# Altium PCB ALTAIR_PD_Sergeant_V26.3b.PcbDoc (part 4 of 4)
Units mm, origin at the board's own origin, x right, y up, seen from the top; angles counter-clockwise.
Board outline 74 x 56 mm, 4 copper layers (Top Layer, Layer 1, Layer 2, Bottom Layer), stack 1.675 mm thick; 215 components, 142 nets, 676 pads, 469 vias.
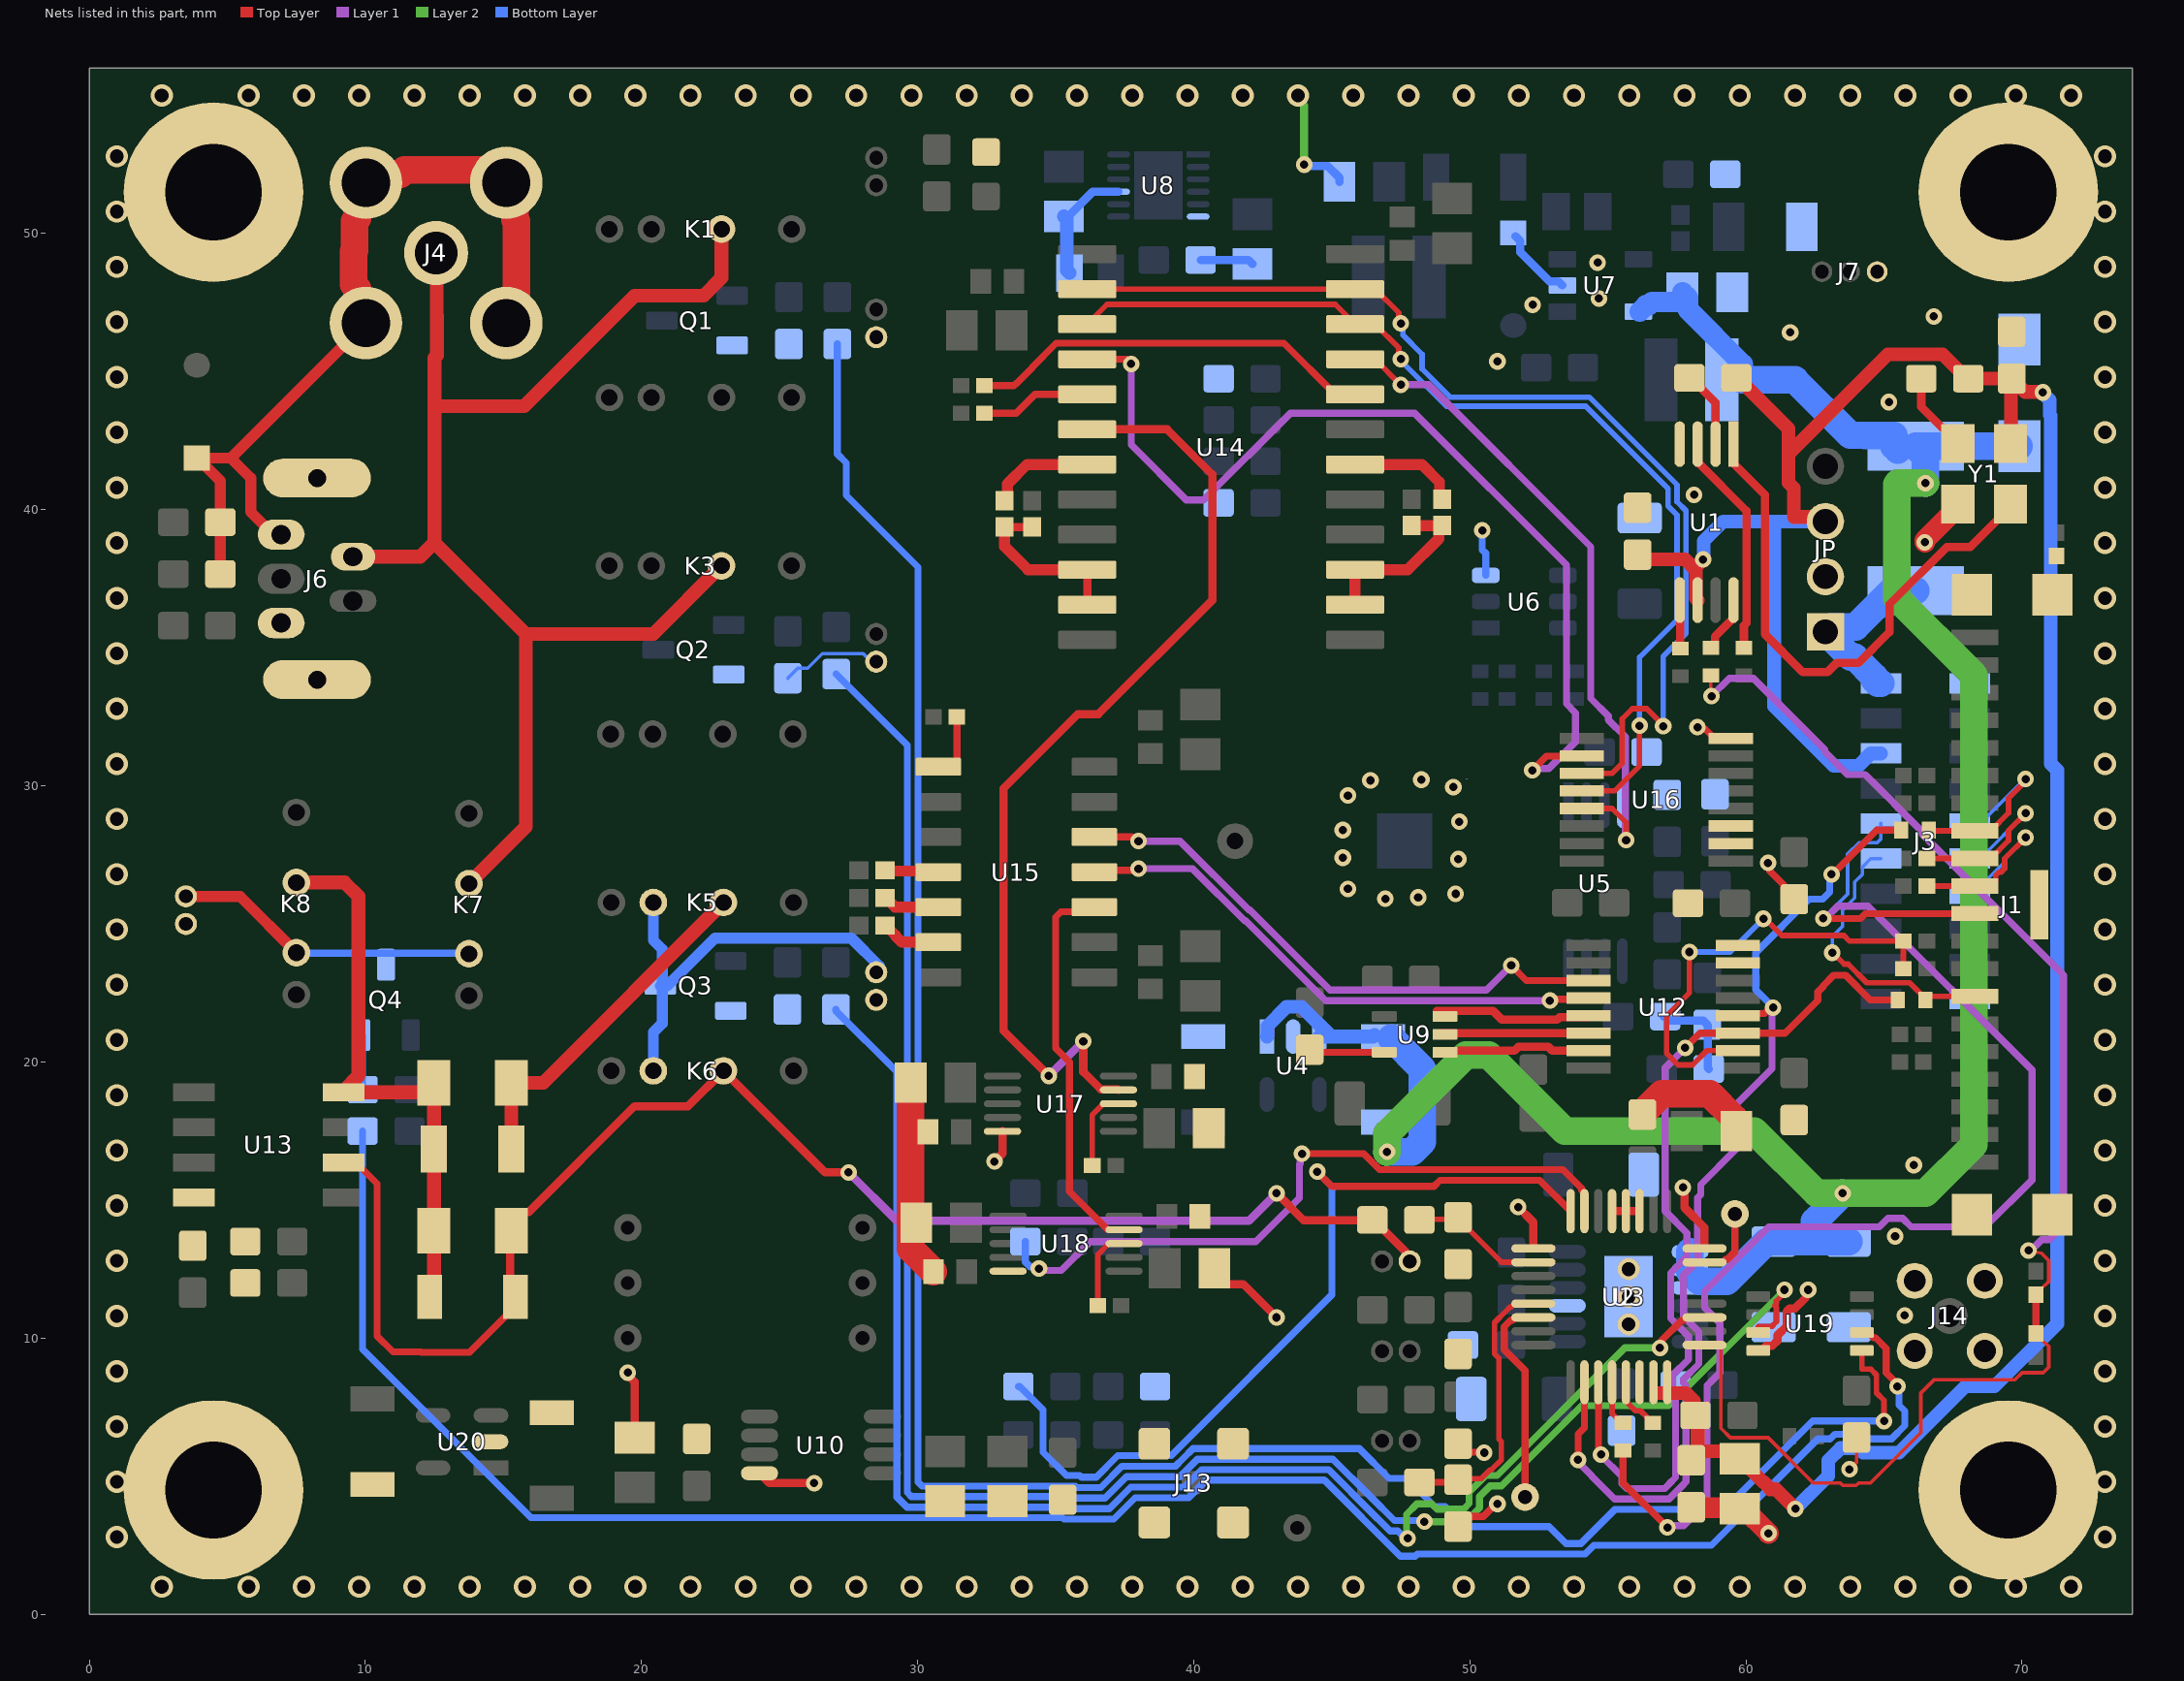
[diagram p5: the nets of this part, all layers, seen from the top]

## Via types
v1: diameter 0.6, hole 0.3, Top Layer to Bottom Layer, 303 vias
v2: diameter 0.8, hole 0.5, Top Layer to Bottom Layer, 122 vias
v3: diameter 0.6, hole 0.3, Top Layer to Bottom Layer, tented both sides, 44 vias

## Nets (pads, with @x,y where several pads share a name; then routed paths per layer and width w, separated by ;. In a path a pad name is that pad's centre, name@x,y a point inside that pad or via, vN(x,y) a via of type N, cw(c..) or ccw(c..) an arc to the next point about the centre after c; other vN are vias at no path point) (continued)
NetR36_2: R36.2 U19.5 | length 84.4
  Top Layer w0.2: U19.5@64.196,9.554 64.196,8.877 64.521,8.877 64.727,8.671 64.727,8.023 65,7.75 v1(65,7)
  Bottom Layer w0.254: R36.2@27.092,46.003 27.092,42.019 27.414,41.697 27.414,40.52 30.012,37.922 30.012,4.792 30.161,4.643 35.722,4.643 35.777,4.588 36.628,4.588 37.405,5.365 39.34,5.365 39.618,5.643 39.975,6 45.995,6 47.072,4.924 47.699,4.924 48.722,3.9 49.1,3.9 49.822,3.178 52.866,3.178 53.482,2.563 54.018,2.563 55.249,3.794 59.209,3.794 62.415,7 v1(65,7)
NetR38_2: R38.2 U19.6 | length 74.3
  Top Layer w0.254: U19.6@64.196,10.204 64.421,10.204 64.617,10.008 64.697,10.008 65.079,9.626 65.079,8.749 65.484,8.344 v1(65.484,8.25)
  Bottom Layer w0.254: R38.2@9.9,17.5 9.9,9.6 16,3.5 35.248,3.5 35.303,3.445 37.102,3.445 37.879,4.222 39.813,4.222 40.448,4.857 44.728,4.857 47.482,2.103 48.018,2.103 48.097,2.182 54.176,2.182 54.494,2.5 58.75,2.5 62.603,6.353 63.051,6.353 63.222,6.524 64.278,6.524 64.449,6.353 65.268,6.353 65.75,6.835 65.75,7.363 65.544,7.569 65.544,8.19 v1(65.484,8.25)
NetR39_2: R39.2 U19.3 | length 70.1
  Top Layer w0.2: U19.3@60.446,10.204 60.446,10.427 60.936,10.427 61.098,10.59 61.098,11.119 61.038,11.179 61.098,11.24 61.098,11.348 61.448,11.698 v1(61.396,11.75)
  Layer 2 w0.254: v1(48.354,3.354) 49.858,3.354 50.353,3.849 50.353,4.268 50.732,4.647 51.151,4.647 54.056,7.552 57.198,7.552 v1(61.396,11.75)
  Bottom Layer w0.254: R39.2@27.05,34.05 29.631,31.469 29.631,4.411 29.78,4.262 35.564,4.262 35.619,4.207 36.786,4.207 36.841,4.262 37.563,4.984 39.498,4.984 40.133,5.619 45.044,5.619 46.401,4.262 47.266,3.397 48.311,3.397 v1(48.354,3.354)
NetR42_2: R42.2 U2.19 | length 54
  Top Layer w0.254: v1(56.884,9.651) 56.951,9.717 56.951,9.922 57.683,10.654 57.742,10.654 57.838,10.75 U2.19@58.5,10.75
  Layer 2 w0.254: v1(47.75,2.75) 47.707,2.793 47.707,3.622 48.086,4.001 48.622,4.001 48.811,3.811 49.777,3.811 49.972,4.007 49.972,4.426 50.574,5.028 50.993,5.028 55.616,9.651 v1(56.884,9.651)
  Bottom Layer w0.254: R42.2@27.04,21.907 27.04,21.857 29.25,19.647 29.25,4.25 29.619,3.881 35.406,3.881 35.461,3.826 36.944,3.826 36.999,3.881 37.721,4.603 39.655,4.603 40.052,5 40.29,5.238 44.886,5.238 45.124,5 46.243,3.881 47.108,3.016 47.39,3.016 47.656,2.75 v1(47.75,2.75)
NetR48_1: R48.1 U2.31 | length 25
  Top Layer w0.254: v1(43.921,16.681) 46.152,16.681 46.732,16.101 53.37,16.101 54.054,15.417 54.054,15.358 54.15,15.262 U2.31@54.15,14.6
  Layer 1 w0.254: v1(34.395,12.52) 34.461,12.454 34.947,12.454 34.949,12.453 35.203,12.453 36.25,13.5 42.25,13.5 43.825,15.075 43.825,16.296 43.855,16.327 43.855,16.615 v1(43.921,16.681)
  Bottom Layer w0.254: R48.1@33.9,13.5 33.9,12.76 34.073,12.586 34.328,12.586 v1(34.395,12.52)
NetR50_1: R50.1 U2.32 | length 31
  Top Layer w0.254: v1(44.472,16.028) 45,15.5 48.702,15.5 48.922,15.72 52.53,15.72 U2.32@53.65,14.6
  Bottom Layer w0.254: R50.1@33.65,8.25 33.7,8.25 34.546,7.404 34.546,5.868 35.39,5.024 35.879,5.024 35.934,4.969 36.47,4.969 37.247,5.746 39.182,5.746 45,11.564 45,15.5 v1(44.472,16.028)
NetR52_2: R52.2 R53.2 U14.2 U14.3 | length 6.4
  Top Layer w0.4: U14.2@45.843,36.56 45.843,37.83 47.755,37.83 48.875,38.95 48.875,39.3 R53.2@49,39.425 R52.2@47.9,39.425
NetR53_1: R53.1 U14.6 | length 4
  Top Layer w0.4: U14.6@45.843,41.64 48.26,41.64 48.901,40.999 48.901,40.499 R53.1@49,40.4
NetR54_1: R54.1 U14.8 | length 14.8
  Top Layer w0.254: R54.1@32.425,44.5 33.487,44.5 33.556,44.569 33.576,44.569 34.154,45.147 34.154,45.167 35.016,46.029 43.269,46.029 45.118,44.18 U14.8@45.843,44.18
NetR55_2: R55.2 R56.2 U14.22 U14.23 | length 6.3
  Top Layer w0.3: R56.2@33.15,39.35 33.175,39.375 R55.2@34.154,39.375 ; U14.23@36.143,36.56 U14.22@36.143,37.83
  Top Layer w0.4: R56.2@33.15,39.375 33.15,38.675 33.995,37.83 U14.22@36.143,37.83
NetR56_1: R56.1 U14.19 | length 3.8
  Top Layer w0.3: R56.1@33.15,40.325 R56.1@33.256,40.431
  Top Layer w0.4: R56.1@33.256,40.431 33.256,40.931 33.965,41.64 U14.19@36.143,41.64
NetR57_1: R57.1 U14.17 | length 4
  Top Layer w0.254: R57.1@32.425,43.5 33.569,43.5 34.249,44.18 U14.17@36.143,44.18
NetR58_2: R58.2 U15.4 | length 2
  Top Layer w0.4: R58.2@28.825,26.95 28.86,26.915 30.715,26.915 U15.4@30.75,26.881
NetR59_2: R59.2 U15.5 | length 2.1
  Top Layer w0.4: R59.2@28.825,25.946 28.85,25.946 29.185,25.611 U15.5@30.75,25.611
NetR60_2: R60.2 U15.6 | length 2.2
  Top Layer w0.4: R60.2@28.825,24.941 28.85,24.941 29.191,24.6 29.191,24.575 29.425,24.341 U15.6@30.75,24.341
NetR61_1: R61.1 U15.1 | length 2.4
  Top Layer w0.254: U15.1@30.75,30.691 31.227,30.691 31.425,30.889 R61.1@31.425,32.5
NetR62_1: R62.1 U17.8 | length 2.9
  Top Layer w0.2: R62.1@36.325,16.25 36.325,18.09 36.735,18.5 U17.8@37.25,18.5
NetR63_1: R63.1 U18.8 | length 2.4
  Top Layer w0.2: R63.1@36.525,11.185 36.525,13.025 U18.8@36.935,13.435
NetR64_1: R64.1 U2.12 | length 1.7
  Top Layer w0.2: U2.12@55.15,8.4 55.15,7.275 55.496,6.929 R64.1@55.546,6.929
NetR65_1: R65.1 U2.13 | length 2
  Top Layer w0.2: U2.13@55.647,7.72 55.994,7.373 56.177,7.373 56.421,7.129 56.421,7.079 56.571,6.929 R65.1@56.621,6.929 ; U2.13@55.65,7.723 U2.13@55.65,8.4
NetR66_1: R66.1 Y1.1 | length 3
  Top Layer w0.3: R66.1@66.35,44.75 66.35,43.725 67.125,42.95 67.225,42.95 67.675,42.5 Y1.1@67.675,42.4
NetR67_1: R67.1 U1.2 | length 2.8
  Top Layer w0.3: R67.1@57.95,44.775 58,44.775 58.9,43.875 U1.2@58.9,42.375
NetR68_2: R68.2 U1.3 | length 8.1
  Top Layer w0.3: U1.3@58.25,42.375 58.25,41.727 60.017,39.96 60.017,35.894 59.925,35.801 R68.2@59.925,35
NetR69_1: R69.1 R71.1 R72.2 U2.17 | length 53.1
  Top Layer w0.127: U2.17@58.5,9.75 59.007,9.75 59.087,9.67 59.087,6.742 59.434,6.395 60.803,6.395 62.448,4.75 63.425,4.75 63.508,4.667 63.992,4.667 64.075,4.75 64.5,4.75 66.333,6.583 66.333,8.009 66.824,8.5 69.75,8.5 70,8.75 70.769,8.75 70.966,8.946 70.966,9.704 70.854,9.815 70.835,9.815 70.5,10.15 R72.2@70.5,10.175 ; R69.1@58.725,34 58.725,33.275 v1(58.75,33.25) ; v1(70.23,13.177) 70.705,13.074 70.779,12.999 70.966,12.813 70.966,12.046 70.854,11.934 70.835,11.934 70.5,11.6 R71.1@70.5,11.575
  Top Layer w0.254: R72.2@70.5,10.175 R71.1@70.5,11.575
  Layer 1 w0.254: v1(58.75,33.25) 59.397,33.897 60.268,33.897 62.853,31.312 62.853,31.232 63.676,30.409 64.318,30.409 66.378,28.349 66.378,28.262 71.5,23.14 71.5,14.076 70.987,13.563 70.71,13.563 70.324,13.177 v1(70.23,13.177)
NetR69_2: R69.2 U1.8 | length 2.1
  Top Layer w0.3: R69.2@58.725,35 58.775,35 58.875,35.1 58.875,35.401 59.55,36.076 U1.8@59.55,36.725
NetR70_2: R70.2 U1.5 | length 1.8
  Top Layer w0.3: U1.5@57.6,36.725 57.612,36.712 57.612,34.987 R70.2@57.625,34.975
NetTP8_1: TP8.1 U2.23 | length 2.6
  Top Layer w0.254: U2.23@58.5,12.75 59.162,12.75 59.258,12.846 59.317,12.846 59.6,13.129 TP8.1@59.6,14.5
NetTP9_1: TP9.1 U2.6 | length 7.7
  Top Layer w0.254: TP9.1@52,4.25 52,8.829 51.246,9.583 51.246,10.417 51.483,10.654 51.542,10.654 51.638,10.75 U2.6@52.3,10.75
NetU1_1: U1.1 Y1.3 | length 19.2
  Top Layer w0.3: U1.1@59.59,41.635 60.687,40.538 60.687,35.488 62.05,34.125 62.952,34.125 63.285,34.459 64.084,34.459 65.196,35.571 65.196,36.571 67.275,38.65 68.125,38.65 69.125,39.65 69.575,40.1 Y1.3@69.575,40.2
NetU9_1: U9.1 U12.15 | length 4.8
  Top Layer w0.3: 49.573,20.412 51.62,20.412 51.76,20.552 52.843,20.552 52.982,20.412 U12.15@54.3,20.412
NetU9_2: U9.2 U12.14 | length 5.3
  Top Layer w0.3: U9.2@48.982,21.047 U12.14@54.3,21.047
NetU9_3: U9.3 U12.13 | length 5.7
  Top Layer w0.3: 48.8,21.85 50.841,21.85 51.154,21.537 53.16,21.537 53.251,21.627 54.245,21.627 U12.13@54.3,21.682
NetU12_11: U12.11 U15.12 | length 20.8
  Top Layer w0.254: U15.12@36.4,28.151 37.755,28.151 37.906,28 v1(38,28) ; v1(51.5,23.5) 52.048,22.952 U12.11@54.3,22.952
  Layer 1 w0.254: v1(38,28) 39.5,28 42,25.5 42.039,25.5 44.935,22.604 50.604,22.604 v1(51.5,23.5)
NetU12_12: U12.12 U15.11 | length 20
  Top Layer w0.254: U15.11@36.4,26.881 36.46,26.94 37.941,26.94 v1(38,27) ; v1(52.898,22.223) 52.946,22.27 54.253,22.27 U12.12@54.3,22.317
  Layer 1 w0.254: v1(38,27) 39.961,27 41.842,25.119 41.881,25.119 44.777,22.223 v1(52.898,22.223)
NetU14_9: U14.9 U16.13 | length 25
  Top Layer w0.2: U14.9@45.843,45.45 46.568,45.45 47.49,44.528 v1(47.5,44.528) ; U16.13@54.05,29.182 55.15,29.182 55.66,28.672 v1(55.66,28.035)
  Layer 1 w0.254: v1(47.5,44.528) 48.511,44.528 54.381,38.658 54.381,33.166 55.021,32.526 55.021,32.389 55.634,31.776 55.634,28.061 v1(55.66,28.035)
NetU14_10: U14.10 U14.15 U16.12 | length 37.5
  Top Layer w0.2: U14.15@36.143,46.72 36.861,47.438 45.125,47.438 U14.10@45.843,46.72 46.568,46.72 47.423,45.865 47.423,45.577 47.5,45.5 v1(47.5,45.456) ; U16.12@54.05,29.817 55.238,29.817 56.147,30.726 v1(56.147,32.177)
  Bottom Layer w0.2: v1(47.5,45.456) 47.5,45.405 49.153,43.752 54.192,43.752 57.177,40.767 57.177,40.136 57.5,39.813 57.5,36.009 56.147,34.656 v1(56.147,32.177)
NetU14_11: U14.11 U14.14 U16.11 | length 39.4
  Top Layer w0.2: U14.14@36.143,47.99 U14.11@45.843,47.99 46.568,47.99 47.423,47.135 47.423,46.827 v1(47.5,46.75) ; U16.11@54.05,30.452 55.15,30.452 55.52,30.823 55.52,32.427 55.89,32.797 56.404,32.797 57.001,32.2 v1(57.001,32.162)
  Bottom Layer w0.2: v1(47.5,46.75) 47.577,46.673 47.577,46.327 48.27,45.633 48.27,45.097 49.288,44.079 54.328,44.079 57.504,40.903 57.504,40.289 57.827,39.966 57.827,35.519 57.001,34.693 v1(57.001,32.162)
NetU14_16: U14.16 U16.10 | length 35.3
  Top Layer w0.254: U14.16@36.143,45.45 37.568,45.45 v1(37.733,45.285) ; v1(52.264,30.564) 52.775,31.075 54.038,31.075 U16.10@54.05,31.087
  Layer 1 w0.254: v1(37.733,45.285) 37.733,42.352 39.732,40.353 40.353,40.353 43.5,43.5 48,43.5 53.5,38 53.5,32.969 53.827,32.642 53.827,31.599 52.858,30.63 52.33,30.63 v1(52.264,30.564)
NetU14_18: U14.18 U17.9 | length 35.6
  Top Layer w0.3: v1(34.75,19.5) 33.108,21.142 33.108,29.906 35.803,32.601 36.548,32.601 40.67,36.722 40.67,41.278 39.038,42.91 U14.18@36.143,42.91 ; v1(36,20.75) 36,19.646 36.631,19.015 37.25,19.015 U17.9@37.275,18.99
  Layer 1 w0.3: v1(34.75,19.5) v1(36,20.75)
NetU15_10: U15.10 U18.9 | length 14.2
  Top Layer w0.254: U15.10@36.4,25.611 36.233,25.444 35.194,25.444 35,25.25 35,20.5 35.5,20 35.5,15.314 36.887,13.927 37.473,13.927 U18.9@37.475,13.925
PD_A: J4.1 J6.2 K1.3 K3.3 K7.3 | length 50.8
  Top Layer w0.5: J6.2@9.55,38.3 11.99,38.3 12.5,38.81 ; J4.1@12.561,49.3 12.58,49.281 12.58,47.033 12.595,47.018 12.595,45.595 12.5,45.5 12.5,43.75 ; K7.3@13.75,26.25 K7.3@13.75,26.46 15.81,28.52 15.81,35.5 ; K1.3@22.898,50.163 22.898,48.398 22.25,47.75 19.75,47.75 15.75,43.75 12.5,43.75 ; K3.3@23,38 22.927,38 K3.3@22.898,37.971 20.427,35.5 15.81,35.5 ; 12.5,38.81 12.5,43.75 ; 12.5,38.81 15.81,35.5
PD_K: C0.2 D3.1 J4.2 J4.3 J4.4 J4.5 J6.1 R0.2 | length 33.1
  Top Layer w0.254: 15.475,49.5 15.525,49.45
  Top Layer w0.4: D3.1@3.897,41.871 5.129,41.871 ; D3.1@3.922,41.871 4.747,41.046 C0.2@4.747,39.551 R0.2@4.747,37.676 ; J6.1@6.95,39.1 6.668,39.1 5.846,39.922 5.846,41.154 5.249,41.751 5.129,41.871 ; 9.566,49.366 9.6,49.4 ; J4.3@10.021,46.76 5.132,41.871 5.129,41.871
  Top Layer w1: 9.566,49.366 9.566,48.158 9.71,48.014 9.71,47.071 J4.3@10.021,46.76 ; 9.6,49.4 9.6,50.442 9.71,50.552 9.71,51.529 J4.5@10.021,51.84 10.021,52.3 10.17,52.151 11.27,52.151 11.42,52.3 14.202,52.3 14.662,51.84 J4.4@15.101,51.84 15.412,51.529 15.412,50.505 15.475,50.442 15.475,49.5 15.475,47.573 15.101,47.2 J4.2@15.101,46.76
rSPI_MOSI: R5.2 U2.10 U12.4 | length 37.9
  Top Layer w0.254: v1(53.919,5.591) 53.919,6.529 54.15,6.76 U2.10@54.15,8.4 ; U12.4@59.7,21.682 59.778,21.761 60.682,21.761 60.89,21.968 v1(60.983,21.968) ; v1(63.1,26.8) 63.133,26.8 64.733,28.4 R5.2@65.625,28.4
  Layer 1 w0.254: v1(53.919,5.591) 53.919,5.467 53.948,5.467 54.018,5.397 54.036,5.397 54.415,5.018 54.415,5 55.24,4.175 57.215,4.175 57.738,4.698 57.738,4.709 57.83,4.801 57.83,8.285 57.738,8.377 57.738,8.512 58.293,9.067 58.293,10.234 57.738,10.79 57.738,12.286 58.246,12.794 58.246,15.085 58.363,15.202 58.363,15.563 59.62,16.82 59.62,18.442 60.944,19.765 60.944,21.929 v1(60.983,21.968)
  Bottom Layer w0.254: v1(60.983,21.968) 60.983,21.984 60.353,22.614 60.353,23.96 62.29,25.897 62.782,25.897 63.034,26.149 63.034,26.734 v1(63.1,26.8)
rSPI_SCLK: R11.2 U2.11 U12.3 | length 32.6
  Top Layer w0.254: U2.11@54.65,8.4 54.659,8.391 54.659,5.841 54.709,5.791 54.714,5.786 v1(54.75,5.786) ; v1(57.8,20.516) 58.332,21.047 61.418,21.047 62.603,22.232 62.603,22.541 62.794,22.732 62.794,22.76 63.181,23.147 63.602,23.147 64.499,22.25 R11.2@65.5,22.25
  Layer 1 w0.254: v1(54.75,5.786) 54.732,5.768 55.506,4.994 55.506,4.728 55.678,4.556 57.057,4.556 57.228,4.728 57.228,4.738 57.449,4.959 57.449,8.128 57.357,8.219 57.357,8.67 57.912,9.225 57.912,10.077 57.277,10.712 57.277,12.364 57.865,12.952 57.865,13.803 57.069,14.599 57.069,19.785 v1(57.8,20.516)
SOLDIER_GUARD: J9.2
  other v3: 46.939,25.91 48.129,25.96 49.484,26.092 45.583,26.27 49.584,27.348 45.4,27.4 45.4,28.4 49.617,28.704 45.583,29.65 49.402,29.96 46.4,30.2 48.245,30.225
SPI_CS_BV: R9.2 R10.2 U12.2 | length 16.6
  Top Layer w0.2: v1(57.955,23.985) 57.955,22.506 57.13,21.681 57.13,20.309 57.543,19.896 58.066,19.896 58.582,20.412 U12.2@59.7,20.412 ; v1(60.629,25.189) 60.696,25.189 61.305,24.58 63.547,24.58 63.752,24.375 R9.2@65.7,24.375 R10.2@65.7,23.375
  Bottom Layer w0.2: v1(57.955,23.985) 59.425,23.985 v1(60.629,25.189)
SPI_MISO: J1.11 J3.09 R64.2 | length 51.5
  Top Layer w0.254: R64.2@55.546,5.929 55.546,4.758 v1(57.157,3.147) ; v1(62.8,25.2) 64.15,25.2 64.325,25.375 J1.11@68.291,25.375
  Layer 1 w0.254: v1(57.157,3.147) 57.223,3.213 57.752,3.213 58.592,4.053 58.592,8.288 59.055,8.752 59.055,10.55 58.5,11.105 58.5,11.7 60.829,14.029 64.828,14.029 65.134,14.336 65.67,14.336 65.977,14.029 68.656,14.029 70.357,15.73 70.357,19.707 64.418,25.646 63.317,25.646 62.871,25.2 v1(62.8,25.2)
  Bottom Layer w0.127: v1(62.8,25.2) 63.683,26.084 63.683,27.536 64.092,27.944 64.755,27.944 64.887,28.076 J3.09@64.887,28.635
SPI_MOSI: J1.8 J3.10 R5.1 | length 7.3
  Top Layer w0.2: R5.1@66.625,28.4 66.65,28.375 68.866,28.375 69.51,29.019 69.51,29.557 70.13,30.177 v1(70.13,30.25)
  Bottom Layer w0.127: J3.10@68.113,28.635 68.481,28.635 70.096,30.25 v1(70.13,30.25)
SPI_SCLK: J1.14 J3.11 R11.1 | length 10.1
  Top Layer w0.2: v1(63.123,23.96) 63.149,23.96 63.56,23.549 63.701,23.549 64.377,22.873 65.927,22.873 66.5,22.3 R11.1@66.5,22.25 ; R11.1@66.625,22.375 J1.14@68.291,22.375
  Bottom Layer w0.127: v1(63.123,23.96) 63.123,24.539 63.5,24.917 63.5,25.5 63.937,25.937 63.937,26.52 64.214,26.796 64.214,27.06 64.519,27.365 J3.11@64.887,27.365
STRT1: J1.9 J3.12 R6.1 | length 7.2
  Top Layer w0.2: R6.1@66.55,27.375 68.866,27.375 69.51,28.019 69.51,28.387 v1(70.13,29.007)
  Bottom Layer w0.127: J3.12@68.113,27.365 68.481,27.365 70.123,29.007 v1(70.13,29.007)
STRT2: J1.10 J3.14 R7.1 | length 7.7
  Top Layer w0.2: R7.1@66.55,26.375 68.866,26.375 69.041,26.55 69.041,26.756 69.158,26.873 69.235,26.873 69.368,27.006 69.368,27.368 v1(70.13,28.13)
  Bottom Layer w0.127: J3.14@68.113,26.095 68.481,26.095 68.786,26.4 68.786,26.664 69.385,27.263 69.385,27.367 70.13,28.112 v1(70.13,28.13)
SYS_DVDD: C53.2 C54.2 C56.2 C57.2 J3.05 JP.3 R1.1 R66.2 R67.2 U1.6 U2.15 U2.16 Y1.4 | length 96.5
  Top Layer w0.5: C57.2@56.25,38.2 57.8,38.2 58.123,37.877 ; U2.15@56.771,8.014 57.828,8.014 58.121,7.721 58.121,7.454 58.371,7.204 58.421,7.204 58.246,7.029 C53.2@58.246,5.804 ; C53.2@58.021,5.579 58.346,5.904 59.5,5.904 C54.2@59.775,5.629 60.623,4.781 60.656,4.781 60.877,4.56 60.877,4.527 61.085,4.527 v1(61.79,3.822) ; U1.6@58.25,36.725 58.19,36.784 58.19,37.81 58.123,37.877 ; v3(58.447,38.2) 58.123,37.877 ; R67.2@59.65,44.775 59.7,44.775 61.54,42.935 61.54,42.025 ; JP.3@62.875,39.575 62.712,39.738 61.737,39.738 61.737,40.783 61.54,40.98 61.54,42.025 ; Y1.4@69.575,42.4 69.6,42.425 69.6,44.725 C56.2@69.625,44.75 ; v1(70.75,44.25) 70.731,44.269 70.106,44.269 69.925,44.45 69.875,44.45 69.625,44.7 C56.2@69.625,44.75 ; 61.54,42.025 65.142,45.627 67.123,45.627 68,44.75 R66.2@68.05,44.75 C56.2@69.625,44.75
  Bottom Layer w0.5: v3(58.447,38.2) 58.466,38.219 58.466,38.866 59.175,39.575 61.025,39.575 ; v1(61.79,3.822) 62.98,5.013 62.98,5.569 63.431,6.02 64.069,6.02 64.24,5.849 65.54,5.849 67.945,8.254 69.001,8.254 71.27,10.523 71.27,30.569 71.037,30.802 71.037,43.396 71,43.433 71,43.973 70.75,44.223 v1(70.75,44.25) ; JP.3@62.875,39.575 61.025,39.575 ; J3.05@64.887,31.175 64.519,31.175 64.074,30.73 63.181,30.73 61.025,32.886 61.025,39.575
SYS_GND: C1.1 C2.1 C3.1 C4.1 C5.2 C6.1 C7.2 C8.1 C9.1 C10.1 C11.1 C12.1 C13.1 C14.1 C17.2 C18.2 C19.2 C20.2 C21.2 C24.2 C26.1 C28.1 C29.1 C32.1 C41.1 C43.1 C44.1 C45.1 C46.1 C47.1 C48.1 C49.1 C50.1 C51.1 C52.1 C53.1 C54.1 C56.1 C57.1 C58.2 C59.2 C60.1 C61.1 C62.1 C63.1 C64.1 C65.2 C66.2 D1.1 D2.1 D4.2 H1.1 H2.1 H3.1 H4.1 J1.MP1 J1.MP2 J1.MP3 J1.MP4 J1.MP5 J3.02 J3.20 J6.5 J6.6 J7.3 J10.1 J11.1 J12.1 J13.2 J14.2 J14.3 J14.4 J14.5 J15.1 JP.2 Q1.2 Q2.2 Q3.2 Q4.2 R8.2 R14.1 R15.1 R17.1 R22.1 R24.1 R31.1 R32.2 R34.2 R35.2 R37.2 R40.2 R41.2 R43.2 R99.1 RT1.1 U1.4 U2.1 U2.14 U2.24 U2.27 U2.28 U2.29 U3.9 U3.13 U4.2 U5.4 U6.3 U7.2 U8.6 U8.9 U10.4 U12.7 U12.8 U13.4 U16.2 U16.3 U16.8 U17.5 U18.5 U19.4 U20.2 Y1.2 | length 65.2
  Top Layer w0.127: v1(63.75,5.25) 64,5.5 C60.1@64,6.4
  Top Layer w0.254: C64.1@49.571,3.179 49.938,3.546 50.491,3.546 50.946,4 v1(51,4) ; C63.1@49.571,6.179 49.883,5.867 50.509,5.867 v1(50.523,5.853) ; v1(58.243,32.124) 58.309,32.058 58.519,32.058 58.855,31.722 U16.8@59.45,31.722 ; v1(60.798,27.211) 60.864,27.144 60.864,26.919 61.377,26.406 61.377,26.273 R8.2@61.75,25.9
  Top Layer w0.3: v1(19.5,8.75) 19.5,8.669 19.75,8.419 C6.1@19.75,6.4 ; U10.4@24.275,5.108 24.633,4.75 v1(26.25,4.75) ; v1(32.781,16.398) 33.075,16.693 U17.5@33.075,17.49 ; C48.1@40.75,12.535 40.75,12.385 41.175,11.96 41.79,11.96 v1(43,10.75) ; v1(51.75,14.75) 52.3,14.2 U2.1@52.3,13.25 ; U2.29@55.15,14.6 U2.27@56.15,14.6 ; C57.1@56.075,40.025 C57.1@56.075,40.075 ; v1(57.716,15.456) 57.773,15.399 57.773,14.728 58.5,14.002 U2.24@58.5,13.25 ; U19.4@60.446,9.554 60.554,9.554 60.727,9.727 60.956,9.727 61.148,9.919 61.148,10.107 61.475,10.434 61.475,10.975 61.58,11.08 61.778,11.08 62.17,11.472 62.17,11.67 v1(62.25,11.75)
  Top Layer w0.75: C53.1@58.021,3.879 58.046,3.854 59.75,3.854 C54.1@59.775,3.829 59.925,3.829 60.817,2.937 v3(60.817,2.932) ; v3(66.475,38.825) 66.475,38.9 67.675,40.1 Y1.2@67.675,40.2
  Top Layer w1: C46.1@29.75,19.25 29.75,13.235 C49.1@30.575,12.41 ; C51.1@56.25,18.1 56.25,18.15 56.952,18.852 58.685,18.852 59.575,17.962 59.575,17.575 C52.1@59.65,17.5
  Layer 2 w0.3: v2(43.775,55) 43.775,54.865 44,54.64 v1(44,52.5)
  Bottom Layer w0.127: R40.2@25.3,33.9 25.662,34.262 26.015,34.262 26.544,34.791 28.027,34.791 28.318,34.5 J11.1@28.5,34.5
  Bottom Layer w0.254: v1(50.45,39.25) 50.45,38.55 50.575,38.425 U6.3@50.575,37.625
  Bottom Layer w0.3: Q4.2@9.85,20.975 9.875,20.95 9.875,19.025 R41.2@9.9,19 ; C20.2@35.45,50.625 36.342,51.517 U8.9@37.278,51.517 ; R32.2@40.25,49.05 41.975,49.05 C19.2@42.125,48.9 ; v1(44,52.5) 44.05,52.45 44.85,52.45 45.275,52.025 C18.2@45.275,51.875 ; D1.1@51.646,49.909 51.649,49.909 51.828,49.73 51.828,49.322 52.875,48.275 53.2,48.275 U7.2@53.35,48.125 ; C10.1@57.025,21.65 C10.1@57.075,21.65 57.225,21.5 58.45,21.5 R22.1@58.6,21.35 58.625,21.325 58.625,19.775 C9.1@58.65,19.75
  Bottom Layer w0.5: C20.2@35.3,50.625 35.4,50.525 35.4,48.675 C21.2@35.5,48.575
  other v2: 2.625,1 5.775,1 7.775,1 9.775,1 11.775,1 13.775,1 15.775,1 17.775,1 19.775,1 21.775,1 23.775,1 25.775,1 27.775,1 29.775,1 31.775,1 33.775,1 35.775,1 37.775,1 39.775,1 41.775,1 43.775,1 45.775,1 47.775,1 49.775,1 51.775,1 53.775,1 55.775,1 57.775,1 59.775,1 61.775,1 63.775,1 65.775,1 67.775,1 69.775,1 71.775,1 1,2.8 73,2.8 1,4.8 73,4.8 1,6.8 73,6.8 1,8.8 73,8.8 1,10.8 73,10.8 1,12.8 73,12.8 1,14.8 73,14.8 1,16.8 73,16.8 1,18.8 73,18.8 1,20.8 73,20.8 1,22.8 73,22.8 1,24.8 73,24.8 1,26.8 73,26.8 1,28.8 73,28.8 1,30.8 73,30.8 1,32.8 73,32.8 1,34.8 73,34.8 1,36.8 73,36.8 1,38.8 73,38.8 1,40.8 73,40.8 1,42.8 73,42.8 1,44.8 73,44.8 1,46.8 73,46.8 1,48.8 73,48.8 1,50.8 73,50.8 1,52.8 73,52.8 2.625,55 5.775,55 7.775,55 9.775,55 11.775,55 13.775,55 15.775,55 17.775,55 19.775,55 21.775,55 23.775,55 25.775,55 27.775,55 29.775,55 31.775,55 33.775,55 35.775,55 37.775,55 39.775,55 41.775,55 45.775,55 47.775,55 49.775,55 51.775,55 53.775,55 55.775,55 57.775,55 59.775,55 61.775,55 63.775,55 65.775,55 67.775,55 69.775,55 71.775,55
  other v3: 65.75,10.825 65.402,13.689 66.078,16.27 58.124,40.545 65.175,43.9 51,45.375 61.6,46.425 66.8,47 52.275,47.425 54.675,47.65 54.625,48.948
SYS_VBAT: F1.1 J3.01 JP.1 | length 6.7
  Bottom Layer w1: J3.01@64.887,33.715 64.782,33.715 64.651,33.847 64.651,33.952 63.943,34.659 63.791,34.659 JP.1@62.875,35.575 63.05,35.75 63.965,35.75 65.29,37.075 F1.1@66.15,37.075
TIA_ADCIN: C61.2 R73.2 U2.2 | length 4.9
  Top Layer w0.2: R73.2@48.171,14.279 48.196,14.304 C61.2@49.546,14.304 ; C61.2@49.571,14.379 49.571,14.329 51.15,12.75 52.292,12.75 U2.2@52.321,12.779
TIA_GAIN_OUT: C31.2 K5.3 R46.2 | length 12.9
  Top Layer w0.5: C31.2@15.25,16.75 15.283,16.783 R46.2@15.283,19.25 16.441,19.25 K5.3@22.969,25.778
TIA_GAIN_RELAY_GND: J12.2 K5.2 K6.2 Q3.3 | length 15.4
  Bottom Layer w0.4: K6.2@20.429,19.682 20.429,21.078 20.75,21.399 20.75,24.088 20.429,24.409 K5.2@20.429,25.778 ; Q3.3@20.682,22.757 20.932,22.757 22.659,24.484 27.602,24.484 J12.2@28.611,23.475
TIA_IN: C30.1 C31.1 K8.3 R45.1 R46.1 U13.8 | length 20.4
  Top Layer w0.5: K8.3@7.5,26.5 9.25,26.5 9.75,26 9.75,19.5 U13.8@9.25,19 ; U13.8@9.212,18.905 12.155,18.905 R46.1@12.5,19.25 ; C30.1@12.25,12 12.433,12 12.483,12.05 R45.1@12.483,13.9 C31.1@12.483,16.85 ; C31.1@12.483,16.983 R46.1@12.483,19.25
TIA_OUT: C30.2 JTIA.1 K6.3 R45.2 R73.1 U13.6 | length 54.6
  Top Layer w0.254: U13.6@9.212,16.365 9.65,16.365 10.424,15.591 10.424,10.076 11,9.5 12.009,9.5 12.021,9.488 13.771,9.488 15.25,10.967 C30.2@15.25,11.683
  Top Layer w0.3: C30.2@15.25,11.683 15.25,14.092 15.733,14.575 15.925,14.575 19.75,18.4 21.687,18.4 K6.3@23,19.713 ; K6.3@22.969,19.682 26.651,16 v1(27.5,16) ; v1(43,15.25) 43.986,14.265 46.457,14.265 R73.1@46.471,14.279 ; R73.1@46.521,14.279 47.725,13.075 47.725,12.875 JTIA.1@47.821,12.779
  Layer 1 w0.3: v1(27.5,16) 29.25,14.25 42,14.25 v1(43,15.25)
TIA_RELAY_GND: J15.2 K7.2 K8.2 Q4.3 | length 11.1
  Top Layer w0.4: J15.2@3.5,26 5.46,26 K8.2@7.5,23.96
  Bottom Layer w0.254: K8.2@7.5,23.96 7.52,23.94 13.73,23.94 K7.2@13.75,23.92
VBAT: C1.2 C2.2 C14.2 C59.1 D4.1 F1.2 L1.1 U3.1 U3.2 U3.3 U4.1 U4.3 U7.5 | length 90.3
  Layer 2 w1: v1(47,16.748) 47,17.406 49.854,20.26 50.682,20.26 53.442,17.5 60.308,17.5 62.558,15.25 v1(63.5,15.25) 66.5,15.25 68.25,17 68.25,34.017 65.455,36.812 65.455,40.918 65.5,40.963 v1(66.5,40.963)
  Bottom Layer w0.5: U4.1@42.65,20.925 42.666,20.941 42.666,21.302 43.364,22 43.901,22 44.976,20.925 ; U4.3@44.55,20.925 44.976,20.925 ; C59.1@46.55,20.975 46.5,20.925 44.976,20.925
  Bottom Layer w0.75: U7.5@56.15,47.175 56.381,47.406 56.485,47.406 56.605,47.525 57.5,47.525 57.7,47.725 C14.2@57.7,47.875 57.9,47.675 57.9,47.252 59.876,45.276 59.876,44.7
  Bottom Layer w1: v1(47,16.748) 47.91,16.748 48.277,17.115 48.277,19.748 C59.1@47.15,20.875 ; U3.1@57.975,13.125 U3.2@57.975,12.475 57.975,12.4 58.323,12.052 59.305,12.052 60.75,13.497 C1.2@61,13.497 62.487,13.497 ; 59.876,44.7 61.771,44.7 63.773,42.698 64.314,42.698 64.317,42.695 F1.2@65.365,42.695 ; v1(63.5,15.25) 62.487,14.237 62.487,13.497 ; C2.2@63.718,13.497 62.487,13.497 ; F1.2@65.365,42.305 F1.2@65.5,42.17 ; v1(66.5,40.963) 66.5,41.955 F1.2@66.15,42.305 D4.1@69.895,42.305
VBIAS: R33.2 U9.6 | length 2.7
  Top Layer w0.254: R33.2@44.2,20.45 44.3,20.35 U9.6@46.9,20.35
VGND_ADCIN: C64.2 R76.2 U2.5 | length 9.8
  Top Layer w0.2: C64.2@49.571,4.915 50.415,4.915 50.733,5.233 50.78,5.233 51.143,5.596 51.143,6.257 51.052,6.349 51.052,9.276 50.892,9.436 50.892,10.564 51.336,11.008 ; 51.337,11.008 51.456,11.127 51.5,11.127 51.652,11.279 U2.5@52.071,11.279
  Top Layer w0.254: R76.2@48.171,4.779 49.471,4.779 C64.2@49.571,4.879
pads on no net: U1.7 U2.25 U3.5 U8.4 U8.7 U10.1 U10.3 U10.7 U10.8 U12.10 U13.3 U16.14 U16.15 U17.2 U17.3 U17.10 U18.2 U18.3 U18.10 U19.7

## Polygon pours and split planes (outlines as drawn)
SYS_GND on Top Layer "SYS_GND_L01_P265" (solid, remove dead copper, pour order 265): 0,56 74,56 74,0 0,0
4V9 on Top Layer "4V9_L01_P264" (solid, remove dead copper, pour order 264): 51.5,53.5 51.5,44.5 50.5,43.5 43,43.5 43,34.5 44.5,33 56,33 56,19 54.5,17.5 43,17.5 43,21 14,21 14,10 11,10 11,12 7,16 2.5,16 2.5,47 3.5,48 8,48 8,53.5
SOLDIER_GUARD on Top Layer "SOLDIER_GUARD_L01_P001" (solid, pour order 225): 47.394,35.162 47.895,34.66 47.895,29.5 46.364,29.5 46.364,33.466 45.701,34.13 44.008,34.13 43.494,34.644 43.494,42.43 48.737,42.43 49.994,41.173 49.994,38.794 47.394,36.194
NetJ9_1 on Top Layer "NETJ9_1_L01_P226" (solid, pour order 226): 46.364,29.236 48.864,29.236 48.864,26.736 46.364,26.736
SOLDIER_GUARD on Top Layer "SOLDIER_GUARD_L03_P001" (solid, pour order 228): 44.688,29.882 45.755,30.95 49.333,30.95 50.582,29.701 50.582,26.244 49.538,25.2 45.863,25.2 44.688,26.375
GUARD on Top Layer "GUARD_L01_P231" (solid, pour order 231): 39,41.7 38.3,42.4 33.6,42.4 31.9,40.7 31.9,36.7 33.31,35.29 39,35.29
GUARD on Top Layer "TraceGuard" (solid, pour order 262): 1011 vertices, not listed, extent 6.107,25.105 38.045,51.556
GUARD on Top Layer "GUARD_L01_P238" (solid, pour order 238): 32.1,30.318 32.1,23.5 29.5,23.5 28.75,24.25 27,24.25 27,30.318
GUARD on Top Layer "Intercon_guard" (solid, pour order 239): 25.574,39.056 25.631,39.052 25.728,39.032 25.782,39.014 25.838,39.003 25.889,38.978 25.942,38.96 25.99,38.928 26.04,38.903 26.123,38.848 26.166,38.81 26.213,38.779 26.25,38.736 26.293,38.699 26.325,38.651 26.362,38.609 26.417,38.526 26.443,38.475 26.474,38.428 26.492,38.374 26.517,38.323 26.529,38.267 26.547,38.214 26.566,38.116 26.572,38.031 26.583,37.947 26.583,32.039 26.572,31.954 26.566,31.869 26.547,31.772 26.529,31.718 26.517,31.662 26.492,31.611 26.474,31.558 26.443,31.51 26.417,31.46 26.362,31.377 26.325,31.334 26.293,31.287 26.25,31.25 26.213,31.207 26.166,31.175 26.123,31.138 26.04,31.083 25.99,31.057 25.942,31.026 25.889,31.008 25.838,30.983 25.782,30.971 25.728,30.953 25.631,30.934 25.574,30.93 25.518,30.919 25.461,30.923 25.405,30.919 25.349,30.93 25.292,30.934 25.195,30.953 25.141,30.971 25.085,30.983 25.034,31.008 24.981,31.026 24.933,31.057 24.883,31.083 24.8,31.138 24.757,31.175 24.71,31.207 24.672,31.25 24.63,31.287 24.598,31.334 24.561,31.377 24.506,31.46 24.48,31.51 24.449,31.558 24.431,31.611 24.405,31.662 24.394,31.718 24.376,31.772 24.357,31.869 24.351,31.954 24.34,32.039 24.34,37.947 24.351,38.031 24.357,38.116 24.376,38.214 24.394,38.267 24.405,38.323 24.431,38.374 24.449,38.428 24.48,38.475 24.506,38.526 24.561,38.609 24.598,38.651 24.63,38.699 24.672,38.736 24.71,38.779 24.757,38.81 24.8,38.848 24.883,38.903 24.933,38.928 24.981,38.96 25.034,38.978 25.085,39.003 25.141,39.014 25.195,39.032 25.292,39.052 25.349,39.056 25.405,39.067 25.461,39.063 25.518,39.067
GUARD on Top Layer "IVC_GUARD" (solid, pour order 258): 23.057,32.983 23.114,32.979 23.212,32.96 23.265,32.941 23.321,32.93 23.372,32.905 23.426,32.887 23.473,32.855 23.524,32.83 23.607,32.775 23.671,32.719 23.738,32.667 25.784,30.621 30.75,30.621 30.834,30.61 30.919,30.605 31.017,30.585 31.07,30.567 31.126,30.556 31.177,30.531 31.231,30.513 31.278,30.481 31.329,30.456 31.412,30.401 31.454,30.363 31.502,30.332 31.539,30.289 31.582,30.252 31.613,30.204 31.651,30.162 31.706,30.079 31.731,30.028 31.763,29.981 31.781,29.927 31.806,29.876 31.817,29.82 31.835,29.767 31.855,29.669 31.858,29.612 31.87,29.557 31.866,29.5 31.87,29.443 31.858,29.388 31.855,29.331 31.835,29.233 31.817,29.18 31.806,29.124 31.781,29.073 31.763,29.019 31.731,28.972 31.706,28.921 31.651,28.838 31.613,28.796 31.582,28.748 31.539,28.711 31.502,28.668 31.454,28.637 31.412,28.599 31.329,28.544 31.278,28.519 31.231,28.487 31.177,28.469 31.126,28.444 31.07,28.433 31.017,28.415 30.919,28.395 30.834,28.39 30.75,28.379 25.319,28.379 25.291,28.382 25.263,28.38 25.207,28.392 25.15,28.395 25.053,28.415 24.999,28.433 24.943,28.444 24.892,28.469 24.839,28.487 24.791,28.519 24.74,28.544 24.74,28.545 24.658,28.599 24.642,28.613 24.615,28.637 24.568,28.668 24.549,28.69 24.526,28.707 22.152,31.081 22.1,31.149 22.044,31.213 21.989,31.295 21.964,31.346 21.932,31.394 21.914,31.447 21.889,31.498 21.878,31.554 21.86,31.608 21.84,31.705 21.837,31.762 21.825,31.818 21.829,31.874 21.825,31.931 21.837,31.987 21.84,32.043 21.86,32.141 21.878,32.195 21.889,32.25 21.914,32.301 21.932,32.355 21.964,32.402 21.989,32.453 22.044,32.536 22.082,32.579 22.113,32.626 22.156,32.663 22.193,32.706 22.241,32.738 22.283,32.775 22.366,32.83 22.417,32.855 22.464,32.887 22.518,32.905 22.569,32.93 22.625,32.941 22.678,32.96 22.776,32.979 22.833,32.983 22.888,32.994 22.945,32.99 23.002,32.994
GUARD on Top Layer "TIA_GUARD" (solid, pour order 261): 290 vertices, not listed, extent 6.38,10.879 13.62,27.621
SYS_GND on Bottom Layer "SYS_GND_L04_P001" (solid, remove dead copper, pour order 252): 0,56 74,56 74,0 0,0
SOLDIER_GUARD on Bottom Layer "SOLDIER_GUARD_L04_P001" (solid, pour order 247): 49.333,26.325 45.958,26.325 45.958,29.775 49.333,29.775
GUARD on Bottom Layer "GUARD_L04_P003" (solid, pour order 190): 10.433,51.825 14.751,51.825 14.751,47.857 13.481,46.587 11.576,46.587 10.433,47.73
GUARD on Bottom Layer "GUARD_L04_P002" (solid, pour order 245): 8.874,36.025 10.006,36.025 11.15,36.724 11.15,39.463 10.502,39.725 8.77,39.725 8.052,39.482 8.052,36.399
VBAT on Bottom Layer "VBAT_L04_P002" (solid, pour order 248): 64,11.925 64.325,12.25 64.325,14.275 64.075,14.525 57.375,14.525 56.7,13.85 56.7,12.975 57.75,11.925
no net on Top Solder "SOLDIER_GUARD_L01_P001" (solid, pour order 221): 47.394,35.162 47.895,34.66 47.895,29.495 46.364,29.495 46.364,33.466 45.701,34.13 44.008,34.13 43.494,34.644 43.494,42.43 48.737,42.43 49.994,41.173 49.994,38.794 47.394,36.194
no net on Top Solder "SOLDIER_GUARD_L03_P001" (solid, pour order 144): 44.688,29.882 45.755,30.95 49.333,30.95 50.582,29.701 50.582,26.244 49.538,25.2 45.863,25.2 44.688,26.375
TIA_ADCIN on Top Solder "TIA_ADCIN_L01_P234" (solid, pour order 234): 32.1,30.4 32.1,23.5 29.5,23.5 28.75,24.25 27,24.25 27,30.4
GUARD on Top Solder "GUARD_L01_P149" (solid, pour order 149): 39,41.7 38.3,42.4 33.6,42.4 32,40.8 32,37.042 33.2,35.5 39,35.3
no net on Top Solder (solid): 11.6,20.4 13.5,20.4 13.5,10.4 11.5,10.4
no net on Top Solder "NONET_LTS_P001" (solid): 0,34.375 0,0.15 0.15,0 74,0 74,56 -0.05,56 -0.05,34.375 1.8,34.375 1.8,3.5 3.775,1.525 69.775,1.525 72.175,3.5 72.175,51.525 69.775,54.075 4.325,54.075 1.775,51.525 1.8,34.375
GUARD on Bottom Solder "GUARD_L04_P003" (solid, pour order 254): 10.433,51.825 14.751,51.825 14.751,47.857 13.481,46.587 11.576,46.587 10.433,47.73
GUARD on Bottom Solder "GUARD_L04_P001" (solid, pour order 246): 8.874,36.025 10.006,36.025 11.15,36.724 11.15,39.463 10.502,39.725 8.77,39.725 8.052,39.482 8.052,36.399
no net on Bottom Solder "NONET_LBS_P001" (solid): 0.025,34.372 0.025,0.125 0.15,0 74,0 74,56 -0.05,56 0.025,34.375 1.8,34.325 1.8,3.5 3.775,1.525 69.825,1.525 72.225,4.35 72.225,50.775 69.825,54.075 4.325,54.075 1.775,51.525 1.8,34.325
SOLDIER_GUARD on Layer 2 "SYS_GND_L03_P001" (solid, remove dead copper, pour order 257): 0,56 74,56 74,0 0,0
4V9 on Layer 2 "4V9_L03_P191" (solid, pour order 191): 51.575,53.349 51.575,44.349 50.575,43.349 43.075,43.349 43.075,34.349 44.575,32.849 56.075,32.849 56.075,18.849 54.575,17.349 43.075,17.349 43.075,20.849 14.075,20.849 14.075,9.849 11.075,9.849 11.075,11.849 7.075,15.849 2.575,15.849 2.575,46.849 3.575,47.849 8.075,47.849 8.075,53.349
SOLDIER_GUARD on Layer 2 "SOLDIER_GUARD_L03_P001" (solid, pour order 148): 44.688,29.882 45.755,30.95 49.333,30.95 50.582,29.701 50.582,26.244 49.538,25.2 45.863,25.2 44.688,26.375
GUARD on Layer 2 "GUARD_L04_P003" (solid, pour order 184): 10.433,51.825 14.751,51.825 14.751,47.857 13.481,46.587 11.576,46.587 10.433,47.73
GUARD on Layer 2 "GUARD_L04_P001" (solid, pour order 188): 8.874,36.025 10.006,36.025 11.15,36.724 11.15,39.463 10.502,39.725 8.77,39.725 8.052,39.482 8.052,36.399
VBAT on Layer 2 "VBAT_L03_P001" (solid, pour order 253): 65.025,38.85 64.4,39.475 64.4,41.04 64.81,41.45 66,41.45 66.625,40.825 66.625,39.725 65.75,38.85
SYS_VBAT on Layer 2 "SYS_VBAT_L03_P001" (solid, pour order 223): 62.975,30.35 63.2,30.575 63.2,33.35 62.9,33.65 62.5,33.65 60.35,31.5 60.35,30.875 60.875,30.35
SYS_GND on Layer 1 "SYS_GND_L02_P001" (solid, remove dead copper, pour order 255): 0,56 74,56 74,0 0,0
4V9 on Layer 1 "4V9_L02_P241" (solid, pour order 241): 51.5,53.5 51.5,44.5 50.5,43.5 43,43.5 43,34.5 44.5,33 56,33 56,19 54.5,17.5 43,17.5 43,21 14,21 14,10 11,10 11,12 7,16 2.5,16 2.5,47 3.5,48 8,48 8,53.5
SOLDIER_GUARD on Layer 1 "SOLDIER_GUARD_L01_P001" (solid, pour order 165): 47.394,35.162 47.895,34.66 47.895,29.495 46.364,29.495 46.364,33.466 45.701,34.13 44.008,34.13 43.494,34.644 43.494,42.43 48.737,42.43 49.994,41.173 49.994,38.794 47.394,36.194
SOLDIER_GUARD on Layer 1 "SOLDIER_GUARD_L02_P001" (solid, pour order 159): 44.588,29.782 45.655,30.85 49.233,30.85 50.477,29.606 50.477,26.139 49.438,25.1 45.762,25.1 44.588,26.275
GUARD on Layer 1 "GUARD_L02_P187" (solid, pour order 187): 39,41.7 38.3,42.4 33.6,42.4 31.9,40.7 31.9,36.7 33.31,35.29 39,35.29
GUARD on Layer 1 "TraceGuard_Sub" (solid, pour order 240): 1011 vertices, not listed, extent 6.126,25.086 38.064,51.537
GUARD on Layer 1 "TIA_GUARD_SUB" (solid, pour order 230): 290 vertices, not listed, extent 6.38,10.879 13.62,27.621
GUARD on Layer 1 "IVC_GUARD_SUB" (solid, pour order 229): 23.037,33.015 23.094,33.012 23.191,32.992 23.245,32.974 23.301,32.963 23.352,32.938 23.405,32.919 23.452,32.888 23.503,32.863 23.586,32.807 23.65,32.751 23.717,32.7 25.763,30.654 30.729,30.654 30.814,30.643 30.899,30.637 30.996,30.618 31.05,30.599 31.106,30.588 31.156,30.563 31.21,30.545 31.257,30.513 31.308,30.488 31.391,30.433 31.434,30.396 31.481,30.364 31.518,30.321 31.561,30.284 31.593,30.237 31.63,30.194 31.685,30.111 31.711,30.06 31.742,30.013 31.76,29.959 31.785,29.908 31.797,29.853 31.815,29.799 31.834,29.701 31.838,29.645 31.849,29.589 31.845,29.532 31.849,29.476 31.838,29.42 31.834,29.363 31.815,29.266 31.797,29.212 31.785,29.156 31.76,29.105 31.742,29.052 31.711,29.004 31.685,28.953 31.63,28.871 31.593,28.828 31.561,28.781 31.518,28.743 31.481,28.701 31.434,28.669 31.391,28.632 31.308,28.576 31.257,28.551 31.21,28.52 31.156,28.501 31.106,28.476 31.05,28.465 30.996,28.447 30.899,28.428 30.814,28.422 30.729,28.411 25.299,28.411 25.271,28.415 25.242,28.413 25.187,28.424 25.13,28.428 25.032,28.447 24.979,28.465 24.923,28.476 24.872,28.501 24.818,28.52 24.771,28.551 24.72,28.576 24.719,28.577 24.637,28.632 24.622,28.645 24.595,28.669 24.547,28.701 24.529,28.722 24.506,28.739 22.132,31.114 22.08,31.181 22.024,31.245 21.969,31.328 21.943,31.379 21.912,31.426 21.894,31.48 21.868,31.531 21.857,31.586 21.839,31.64 21.82,31.738 21.816,31.794 21.805,31.85 21.809,31.907 21.805,31.963 21.816,32.019 21.82,32.076 21.839,32.173 21.857,32.227 21.868,32.283 21.894,32.334 21.912,32.388 21.943,32.435 21.969,32.486 22.024,32.568 22.061,32.611 22.093,32.658 22.135,32.696 22.173,32.738 22.22,32.77 22.263,32.807 22.346,32.863 22.396,32.888 22.444,32.919 22.497,32.938 22.548,32.963 22.604,32.974 22.658,32.992 22.755,33.012 22.812,33.015 22.868,33.026 22.924,33.023 22.981,33.026
GUARD on Layer 1 "GUARD_L02_P219" (solid, pour order 219): 32.1,30.318 32.1,23.5 29.5,23.5 28.75,24.25 27,24.25 27,30.318
GUARD on Layer 1 "Intercon_guard_Sub" (solid, pour order 224): 25.574,39.056 25.631,39.052 25.728,39.032 25.782,39.014 25.838,39.003 25.889,38.978 25.942,38.96 25.99,38.928 26.04,38.903 26.123,38.848 26.166,38.81 26.213,38.779 26.25,38.736 26.293,38.699 26.325,38.651 26.362,38.609 26.417,38.526 26.443,38.475 26.474,38.428 26.492,38.374 26.517,38.323 26.529,38.267 26.547,38.214 26.566,38.116 26.572,38.031 26.583,37.947 26.583,32.039 26.572,31.954 26.566,31.869 26.547,31.772 26.529,31.718 26.517,31.662 26.492,31.611 26.474,31.558 26.443,31.51 26.417,31.46 26.362,31.377 26.325,31.334 26.293,31.287 26.25,31.25 26.213,31.207 26.166,31.175 26.123,31.138 26.04,31.083 25.99,31.057 25.942,31.026 25.889,31.008 25.838,30.983 25.782,30.971 25.728,30.953 25.631,30.934 25.574,30.93 25.518,30.919 25.461,30.923 25.405,30.919 25.349,30.93 25.292,30.934 25.195,30.953 25.141,30.971 25.085,30.983 25.034,31.008 24.981,31.026 24.933,31.057 24.883,31.083 24.8,31.138 24.757,31.175 24.71,31.207 24.672,31.25 24.63,31.287 24.598,31.334 24.561,31.377 24.506,31.46 24.48,31.51 24.449,31.558 24.431,31.611 24.405,31.662 24.394,31.718 24.376,31.772 24.357,31.869 24.351,31.954 24.34,32.039 24.34,37.947 24.351,38.031 24.357,38.116 24.376,38.214 24.394,38.267 24.405,38.323 24.431,38.374 24.449,38.428 24.48,38.475 24.506,38.526 24.561,38.609 24.598,38.651 24.63,38.699 24.672,38.736 24.71,38.779 24.757,38.81 24.8,38.848 24.883,38.903 24.933,38.928 24.981,38.96 25.034,38.978 25.085,39.003 25.141,39.014 25.195,39.032 25.292,39.052 25.349,39.056 25.405,39.067 25.461,39.063 25.518,39.067

## Other copper
Top Layer:
  pour cut-out: 25.609,38.432 25.7,38.394 25.783,38.338 25.853,38.268 25.908,38.186 25.946,38.094 25.965,37.997 25.965,37.972 25.97,37.947 25.97,32.039 25.965,32.014 25.965,31.989 25.946,31.891 25.908,31.8 25.853,31.717 25.783,31.647 25.7,31.592 25.609,31.554 25.511,31.535 25.412,31.535 25.314,31.554 25.223,31.592 25.14,31.647 25.07,31.717 25.015,31.8 24.977,31.891 24.958,31.989 24.958,32.014 24.953,32.039 24.953,37.947 24.958,37.972 24.958,37.997 24.977,38.094 25.015,38.186 25.07,38.268 25.14,38.338 25.223,38.394 25.314,38.432 25.412,38.451 25.511,38.451
  pour cut-out: 23.143,44.787 23.234,44.749 23.399,44.638 23.47,44.568 23.58,44.403 23.618,44.311 23.657,44.116 23.657,44.1 26.697,41.06 27.75,41.06 27.774,41.055 27.8,41.055 27.917,41.032 27.992,41 28.008,40.994 28.107,40.927 28.125,40.91 28.146,40.896 33.232,35.81 34.965,35.81 35.007,35.838 35.045,35.853 35.084,35.861 35.142,35.873 37.144,35.873 37.179,35.866 37.241,35.853 37.279,35.838 37.324,35.808 37.361,35.783 37.382,35.752 37.416,35.701 37.431,35.663 37.439,35.624 37.451,35.566 37.451,35.014 37.444,34.979 37.431,34.917 37.416,34.879 37.386,34.834 37.361,34.797 37.33,34.776 37.279,34.742 37.241,34.727 37.202,34.719 37.144,34.707 35.86,34.707 35.8,34.695 35.775,34.695 35.75,34.69 33,34.69 32.976,34.695 32.95,34.695 32.833,34.718 32.758,34.75 32.742,34.756 32.643,34.823 32.625,34.84 32.604,34.854 27.518,39.94 26.465,39.94 26.44,39.945 26.415,39.945 26.298,39.968 26.222,40 26.207,40.006 26.108,40.073 26.09,40.09 26.069,40.104 22.865,43.308 22.848,43.308 22.653,43.347 22.562,43.385 22.397,43.495 22.326,43.565 22.216,43.731 22.178,43.822 22.139,44.017 22.139,44.116 22.178,44.311 22.216,44.403 22.326,44.568 22.397,44.638 22.562,44.749 22.653,44.787 22.848,44.826 22.948,44.826
  pour cut-out: 25.683,50.883 25.774,50.845 25.939,50.734 26.01,50.664 26.12,50.499 26.158,50.408 26.197,50.213 26.197,50.113 26.158,49.918 26.12,49.827 26.029,49.69 26.029,47.27 26.024,47.245 26.024,47.22 26.004,47.123 25.982,47.069 25.967,47.031 25.947,47.001 25.947,44.631 26.01,44.568 26.12,44.403 26.158,44.311 26.197,44.116 26.197,44.017 26.158,43.822 26.12,43.731 26.01,43.565 25.939,43.495 25.774,43.385 25.683,43.347 25.488,43.308 25.388,43.308 25.193,43.347 25.102,43.385 24.937,43.495 24.866,43.565 24.756,43.731 24.718,43.822 24.679,44.017 24.679,44.116 24.718,44.311 24.756,44.403 24.866,44.568 24.929,44.631 24.929,47.188 24.934,47.212 24.934,47.237 24.954,47.335 24.976,47.388 24.991,47.426 25.011,47.456 25.011,49.542 24.937,49.591 24.866,49.662 24.756,49.827 24.718,49.918 24.679,50.113 24.679,50.213 24.718,50.408 24.756,50.499 24.866,50.664 24.937,50.734 25.102,50.845 25.193,50.883 25.388,50.922 25.488,50.922
  pour cut-out: 23.092,32.359 23.146,32.337 23.184,32.321 23.266,32.266 23.284,32.248 23.305,32.234 25.53,30.009 30.75,30.009 30.775,30.004 30.8,30.004 30.897,29.984 30.989,29.947 31.071,29.891 31.141,29.821 31.197,29.739 31.234,29.647 31.254,29.55 31.254,29.45 31.234,29.353 31.197,29.261 31.141,29.179 31.071,29.109 30.989,29.053 30.897,29.016 30.8,28.996 30.775,28.996 30.75,28.991 25.319,28.991 25.295,28.996 25.27,28.996 25.172,29.016 25.097,29.047 25.081,29.053 25.053,29.072 24.998,29.109 24.98,29.126 24.96,29.14 22.585,31.515 22.571,31.535 22.554,31.553 22.498,31.636 22.461,31.727 22.441,31.825 22.441,31.924 22.461,32.021 22.483,32.075 22.498,32.113 22.554,32.196 22.6,32.242 22.624,32.266 22.706,32.321 22.798,32.359 22.895,32.378 22.995,32.378
  pour cut-out: 9.275,27.004 9.3,27.004 9.397,26.984 9.451,26.962 9.489,26.947 9.571,26.891 9.589,26.874 9.61,26.86 10.11,26.36 10.124,26.339 10.141,26.321 10.197,26.239 10.234,26.147 10.244,26.098 10.254,26.05 10.254,26.025 10.259,26 10.259,19.5 10.254,19.475 10.254,19.45 10.246,19.414 11.944,19.414 12.071,19.541 12.092,19.571 12.162,19.641 12.244,19.697 12.336,19.734 12.433,19.754 12.532,19.754 12.55,19.754 12.647,19.734 12.723,19.703 12.739,19.697 12.821,19.641 12.856,19.606 12.891,19.571 12.947,19.489 12.984,19.397 13.004,19.3 13.004,19.2 12.992,19.139 12.992,16.983 12.987,16.958 12.987,16.933 12.983,16.916 12.987,16.9 12.987,16.875 12.992,16.85 12.992,12.05 12.987,12.025 12.987,12 12.967,11.903 12.936,11.827 12.929,11.811 12.911,11.784 12.874,11.729 12.856,11.711 12.843,11.69 12.793,11.64 12.772,11.626 12.754,11.609 12.671,11.553 12.58,11.516 12.531,11.506 12.482,11.496 12.457,11.496 12.433,11.491 12.25,11.491 12.225,11.496 12.2,11.496 12.103,11.516 12.011,11.553 11.929,11.609 11.859,11.679 11.803,11.761 11.766,11.853 11.746,11.95 11.746,12.05 11.766,12.147 11.803,12.239 11.859,12.321 11.929,12.391 11.974,12.422 11.974,16.85 11.979,16.875 11.979,16.9 11.982,16.916 11.979,16.933 11.979,16.958 11.974,16.983 11.974,18.396 9.212,18.396 9.187,18.401 9.162,18.401 9.065,18.421 8.973,18.458 8.891,18.514 8.821,18.584 8.765,18.666 8.728,18.758 8.708,18.855 8.708,18.955 8.728,19.052 8.764,19.141 8.766,19.147 8.788,19.201 8.803,19.239 8.859,19.321 8.876,19.339 8.89,19.36 9.241,19.711 9.241,25.789 9.039,25.991 7.5,25.991 7.475,25.996 7.45,25.996 7.353,26.016 7.261,26.053 7.179,26.109 7.109,26.179 7.053,26.261 7.016,26.353 6.996,26.45 6.996,26.55 7.016,26.647 7.053,26.739 7.109,26.821 7.179,26.891 7.261,26.947 7.353,26.984 7.45,27.004 7.475,27.004 7.5,27.009 9.25,27.009
  pour cut-out: 279 vertices and 0 holes, not listed, extent 8.491,25.701 23.657,50.922
  pour cut-out: 7.745,29.76 7.836,29.722 8.001,29.612 8.072,29.541 8.093,29.509 13.186,29.509 13.249,29.572 13.414,29.682 13.505,29.72 13.7,29.759 13.8,29.759 13.995,29.72 14.086,29.682 14.251,29.572 14.322,29.501 14.432,29.336 14.47,29.245 14.509,29.05 14.509,28.95 14.47,28.755 14.432,28.664 14.322,28.499 14.251,28.428 14.086,28.318 13.995,28.28 13.8,28.241 13.7,28.241 13.505,28.28 13.414,28.318 13.249,28.428 13.186,28.491 8.024,28.491 8.001,28.468 7.836,28.358 7.745,28.32 7.55,28.281 7.45,28.281 7.255,28.32 7.164,28.358 6.999,28.468 6.928,28.539 6.818,28.704 6.78,28.795 6.741,28.99 6.741,29.09 6.78,29.285 6.818,29.376 6.928,29.541 6.999,29.612 7.164,29.722 7.255,29.76 7.45,29.799 7.55,29.799

## Silkscreen, mask and mechanical layers (free items; w line width, h text height)
Top Overlay:
  drawing of 59 lines, arcs and shapes, not listed
  text "ALTAIR PD Readout-" at 39.4,52.421 h2
  text "Sergeant" at 57.541,52.349 h2
  text ".Revision" at 56.885,50.799 h1.5
  text "ACF" at 27.4,49.413 h1.2
  text "D.R., / P.D.B., / N.S." at 56.75,45.876 h2
  text "Temp OUT" at 61.2,45.811 h1.2
  text "UVIC" at 51.85,44.221 h2
  text "WayWayWay" at 41.858,40.5 h0.8 r90
  text "IVC" at 27.1,32.613 h1.2
  text "VGND Isolators" at 52.85,32.613 h1.2
  text "PHOTODIODE / IN/OUT" at 6.356,30.809 h1.2
  text "Bias" at 42.821,23.067 h1.2
  text "Level Shift Amps" at 31.497,20.553 h1.2
  text "AA Filters" at 42.898,16.284 h1.2
  text "ADC" at 51.687,16.222 h1.2
  text "CLK / OUT" at 64.056,14.309 h1.2
  text "2.5Adc" at 60.3,13.713 h1.2
  text "5VSW" at 20.4,13.615 h1.2
  text "4v9" at 25.4,13.515 h1.2
  text "BiasV" at 20.411,11.528 h1.2
  text "-11V" at 24.9,11.4 h1.2
  text "10V" at 20.411,9.228 h1.2
  text "2.5V" at 24.9,9.113 h1.2
  text "TIA" at 2.359,8.34 h1.2
  text "AMP OUT" at 37.639,7.713 h1.2
  text "2.5Vref" at 18.639,7.706 h1.2
  text "AVDD" at 44.359,2.151 h1.2
Bottom Overlay:
  lines w0.2: 31.6,53.9 31.6,45.8 31.7,45.7 44.1,45.7 ; 44.1,54 44.1,43.9 ; 45.8,14.9 45.8,2.1 48.6,2.1 65.2,2.1 65.2,11.5 65.2,17.5 48.3,17.5 48.2,17.5 ; 49,33.5 49.5,34 ; 49,34 49.5,34 ; 49,34.5 49.5,34 ; 59.3,32.4 60,32.4 60,31.7 ; 60,26 63,26 ; 60,33.5 59,33.5 59,41.4 ; 63,17.5 63,33.5 ; 65.6,53.9 65.6,48 59,41.4 ; 44.1,43.9 52.4,43.9 54.9,41.4 59,41.4 ; 44.1,43.9 44.1,43.9 ; 48.2,17.5 48.2,15 48.1,14.9 47.4,14.9 38.4,14.9 38.4,21.7 38.4,22.1 48.2,22.1 48.2,21.7 48.2,17.5 ; 49.5,34 49.5,34
  text "-16V" at 65.4,53.013 h1.2
  text "-11V Regulator" at 39.2,46.126 h1.2
  text "VGND" at 62.9,32.613 h1.2
  text "5VSW" at 62.9,17.615 h1.2
  text "10V Regulator" at 65.1,16.626 h1.2
  text "TP4" at 50.7,16.2 h0.8
  text "TP8" at 62.3,15.2 h0.8
  text "AVDD 5V" at 48.1,15.013 h1.2
  text "TP5" at 26.7,14.7 h0.8
  text "TP6" at 23,14.6 h0.8
  text "4v9" at 26.7,13.715 h1.2
  text "5VSW" at 23.5,13.615 h1.2
  text "TP1" at 26.7,12.4 h0.8
  text "TP7" at 23.1,12.3 h0.8
  text "-11V" at 26.8,11.3 h1.2
  text "BiasV" at 23.3,11.213 h1.2
  text "TP2" at 26.7,9.9 h0.8
  text "TP3" at 23,9.8 h0.8
  text "10V" at 22.8,8.713 h1.2
  text "2.5V" at 26.7,8.713 h1.2
  text "TP9" at 51.2,3.9 h0.8

## Dimensions
74,0 to 74,56 on Mechanical 1
0,0 to 74,0 on Mechanical 1